# Altium PCB EV-Charger-with-sim800c_2023-07-29.pcbdoc
Units mil, origin at the board's own origin, x right, y up, seen from the top; angles counter-clockwise.
Board outline 5808.48 x 3906.63 mil, 2 copper layers (Top Layer, Bottom Layer); 82 components, 67 nets, 312 pads, 126 vias.
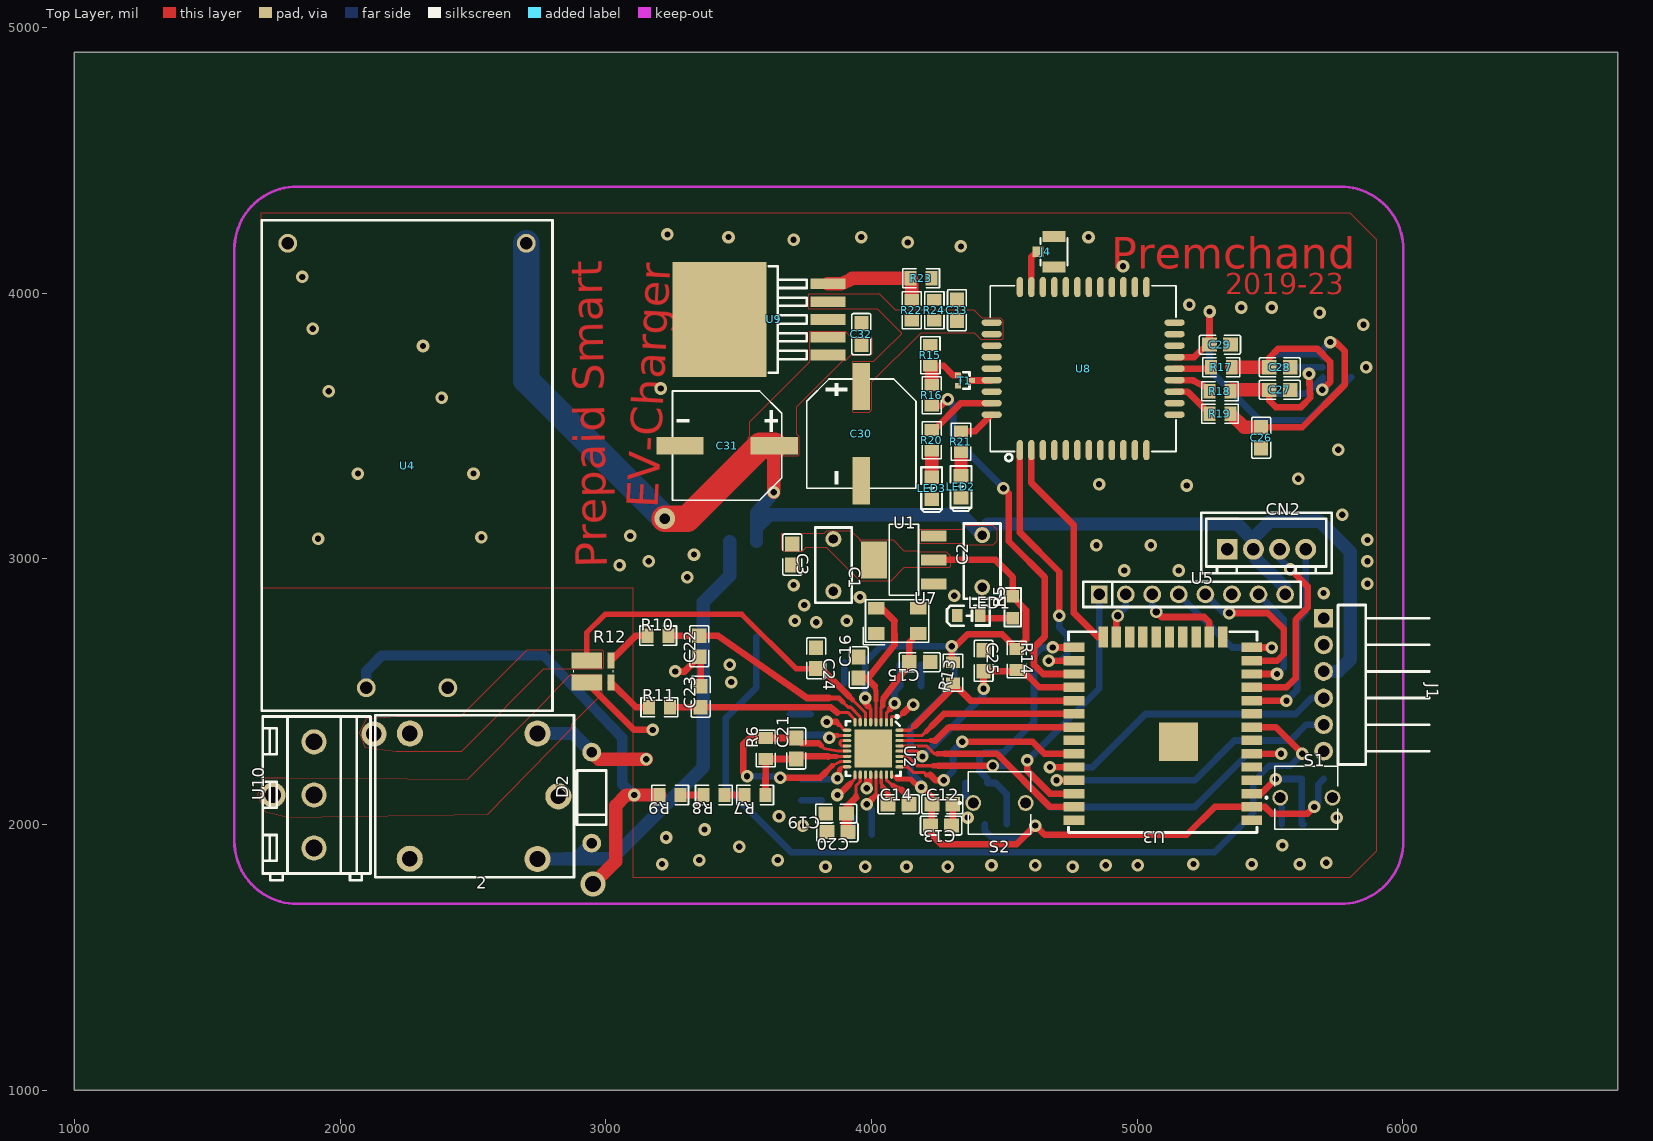
[diagram p0: Top Layer view]
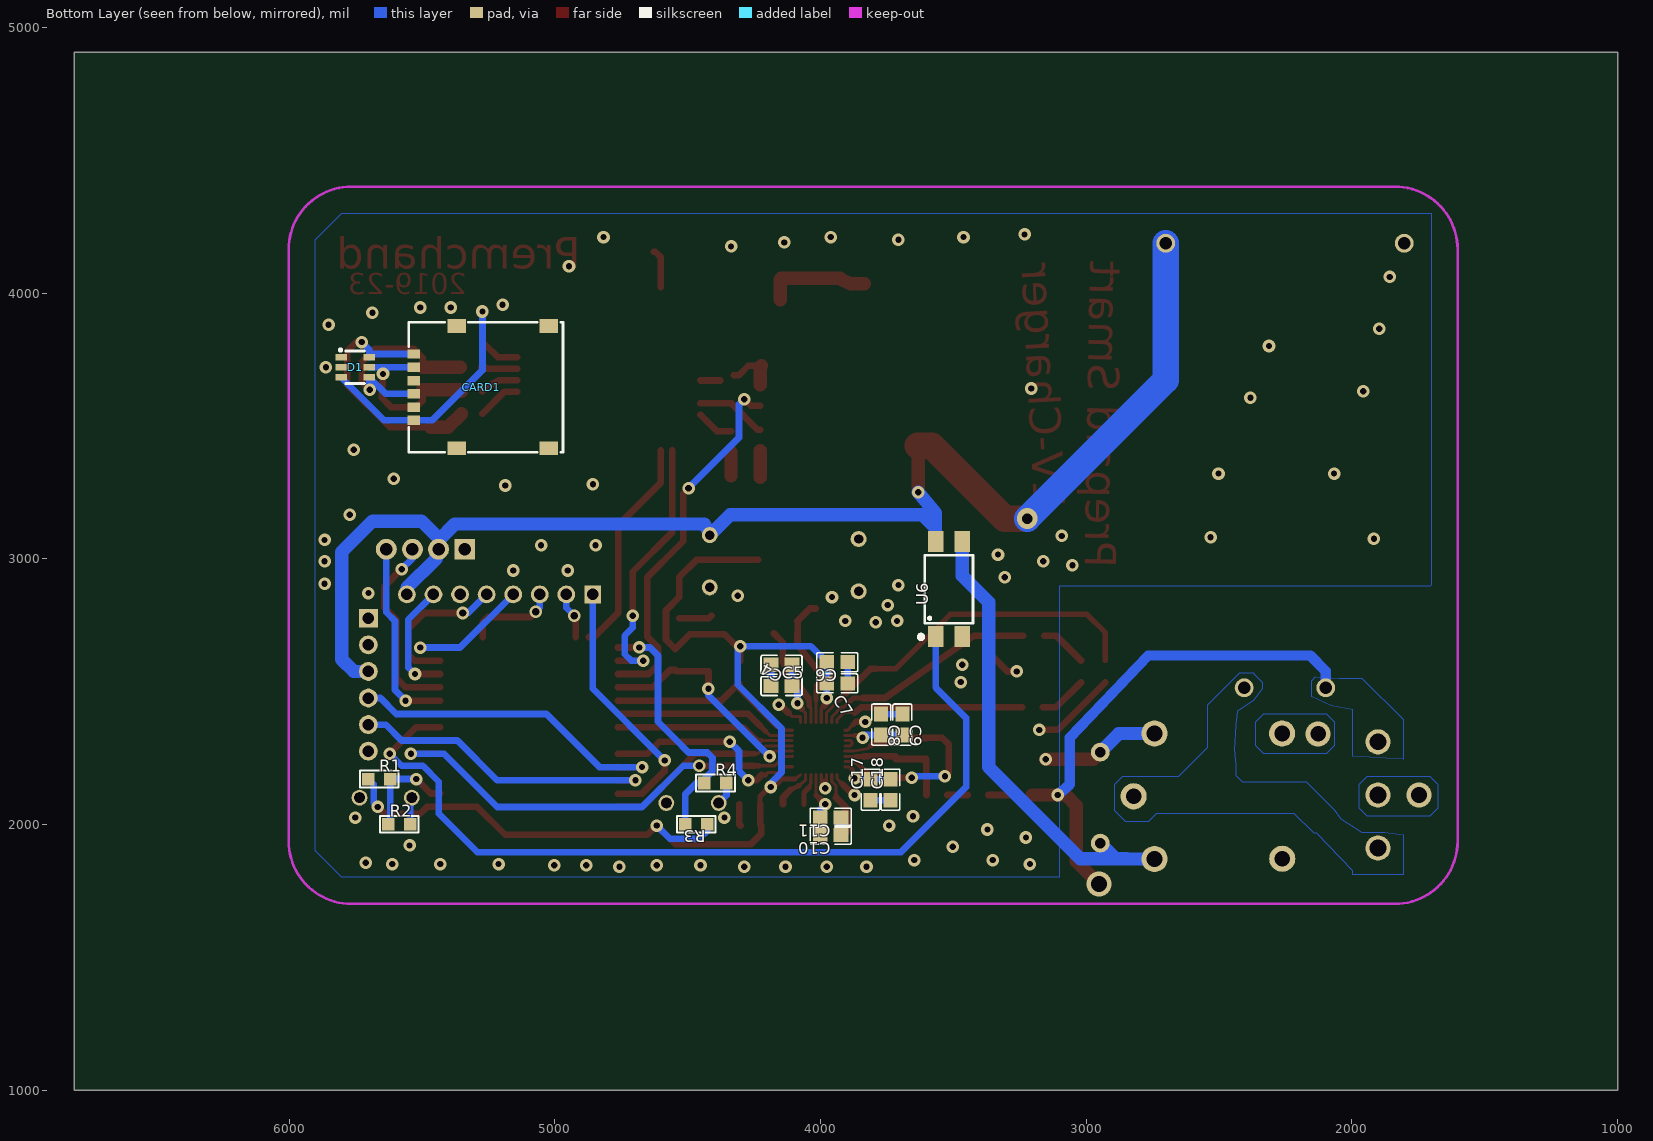
[diagram p1: Bottom Layer view, seen from below]

## Layer stack, top to bottom
Top Layer: signal copper (thickness not stored)
Dielectric: dielectric 12.6, FR-4, Dk 4.8
Bottom Layer: signal copper (thickness not stored)

## Board outline
6808.48,1000 1000,1000 1000,4906.63 6808.48,4906.63

## Components (designator, comment, footprint, x,y, rotation, side; value= is the part's Value field where it differs from the comment)
2 "RELAY-HE-JQC3FC" RELAY-HE-JQC3FC 2542,2106.63 r180 top
C1 "100nF" CAP-TH_L7.2-W3.5-P5.00-D0.5 3857,2976.63 r270 top
C2 "100nF" CAP-TH_L7.2-W3.5-P5.00-D0.5 4417,2991.63 r90 top
C3 "10uF" C0805#1 3702,3016.63 r270 top
C4 "0.1u" C0805#2 4147,2601.63 r180 bottom
C5 "4.7u" C0805#2 4147,2521.63 r0 bottom
C6 "4.7u" C0805#2 3937,2611.63 r180 bottom
C7 "0.1u" C0805#2 3937,2531.63 r180 bottom
C8 "4.7u" C0805#2 3772,2376.63 r90 bottom
C9 "0.1u" C0805#2 3692,2376.63 r90 bottom
C10 "0.1u" C0805#2 3962,1961.63 r180 bottom
C11 "4.7u" C0805#2 3962,2026.63 r180 bottom
C12 "0.1u" C0805#1 4267,2076.63 r180 top
C13 "4.7u" C0805#1 4262,1996.63 r180 top
C14 "0.47u" C0805#1 4102,2076.63 r0 top
C15 "22p" C0805#1 4182,2611.63 r180 top
C16 "22p" C0805#1 3952,2591.63 r90 top
C17 "0.1u" C0805#2 3812,2131.63 r270 bottom
C18 "4.7u" C0805#2 3737,2131.63 r270 bottom
C19 "0.1u" C0805#1 3867,2041.63 r180 top
C20 "4.7u" C0805#1 3872,1971.63 r180 top
C21 "0.15uf" C0805#1 3717,2286.63 r90 top
C22 "0.1u" C0805#1 3352,2671.63 r90 top
C23 "0.1u" C0805#1 3357,2481.63 r90 top
C24 "0.1u" C0805#1 3792,2626.63 r270 top
C25 "1u" C0805#1 4422,2616.63 r270 top
C26 "22pf" C0805#1 5467,3456.63 r90 top
C27 "22pf" C0805#1 5537,3636.63 r180 top
C28 "22pf" C0805#1 5537,3721.63 r180 top
C29 "100nf" C0805#1 5312,3806.63 r180 top
C30 "330uF" CAP-SMD_BD10.0-L10.3-W10.3-LS10.8-FD 3962,3471.63 r270 top
C31 "100uf" CAP-SMD_BD10.0-L10.3-W10.3-LS10.8-FD 3457,3426.63 r180 top
C32 "1uf" C0805#1 3962,3846.63 r270 top
C33 "100nf" C0805#1 4322,3936.63 r270 top
CARD1 "SMN-305-ARP7" NANO-SIM-SMD_SMN-305-ARP7 5277,3646.63 r270 bottom
CN2 "LCD" CONN-TH_XH-4A 5487,3036.63 r0 top
D1 "ESDA6V1-5SC6" SOT-23-6_L2.9-W1.6-P0.95-LS2.8-BR 5752,3721.63 r180 bottom
D2 "1N4007" DO-41_BD2.4-L4.7-P8.70-D0.9-RD 2947,2101.63 r90 top
J1 "TTL_And_5V-input" HDR-TH_6P-P2.54-H-M-W10.0 5702,2526.63 r270 top
J4 "UFL connector" CONUFL001-SMD 4687,4156.63 r270 top
LED1 "LED0805" LED0805-RD 4367,2786.63 r0 top
LED2 "LED-0805_R" LED0805_RED 4337,3271.63 r270 top
LED3 "LED-0805_B" LED0805_BLUE 4227,3266.63 r270 top
R1 "12K" "RESISTOR SMD 0805"#1 5702,2171.63 r0 bottom
R2 "470" "RESISTOR SMD 0805"#1 5627,2001.63 r0 bottom
R3 "12K" "RESISTOR SMD 0805"#1 4427,2001.63 r180 bottom
R4 "470" "RESISTOR SMD 0805"#1 4437,2156.63 r0 bottom
R5 "330" "RESISTOR SMD 0805"#2 4532,2776.63 r90 top
R6 "1k" R0805 3602,2286.63 r90 top
R7 "330k" R0805 3562,2111.63 r180 top
R8 "330k" R0805 3407,2111.63 r180 top
R9 "330k" R0805 3242,2111.63 r180 top
R10 "150" R0805 3197,2711.63 r0 top
R11 "150" R0805 3202,2441.63 r0 top
R12 "WSK12161L000FEA" WSK12161L000FEA 2952,2576.63 r0 top
R13 "10k" R0805 4307,2571.63 r90 top
R14 "10k" R0805 4547,2621.63 r90 top
R15 "47K" R0805 4222,3766.63 r270 top
R16 "4.7K" R0805 4227,3616.63 r270 top
R17 "51R" R0805 5317,3721.63 r180 top
R18 "51R" R0805 5312,3631.63 r180 top
R19 "51R" R0805 5312,3546.63 r180 top
R20 "470" R0805 4227.03,3446.61 r270 top
R21 "470" R0805 4337,3441.63 r270 top
R22 "100K" R0805 4152,3936.63 r270 top
R23 "43K" R0805 4187,4056.63 r180 top
R24 "470" R0805 4237,3936.63 r90 top
S1 "ENABLE" SW_BUTT-2 5637,2101.63 r0 top
S2 "BOOT" SW_BUTT-2 4482,2081.63 r0 top
T1 "BC847F" SOT490 4352,3671.63 r270 top
U1 "AMS1117-1.8_C2891837" SOT-223_L6.5-W3.5-P2.30-LS7.0-BR 4122,2996.63 r0 top
U2 "ADE9153AACPZ" LFCSP-32_L5.0-W5.0-P0.50-TL-EP3.6 4007,2286.63 r270 top
U3 "ESP32-WROOM-32U(4MB)" WIFI-SMD_ESP32-WROOM-32UE-A 5097.05,2361.64 r180 top
U4 "HLK-10M05" PWRM-TH_HLK-10M05 2252,3351.63 r90 top
U5 "RFID" HDR-TH_8P-P2.54-V-F 5207,2866.63 r0 top
U6 "Optocoupler_Relay" SMD-4_L6.5-W4.6-P2.54-LS10.3-TL 3516.97,2886.64 r270 bottom
U7 "12.288MHz" CRYSTAL-SMD_4P-L5.0-W3.2-BL 4097,2766.63 r0 top
U8 "SIM800C" GSM-SMD_42P-L17.6-W15.7-P1.10-TL 4797,3716.63 r90 top
U9 "MIC29302WU_C2995533" TO-263-5_L10.1-W8.7-P1.70-LS15.2-BR 3632,3901.63 r0 top
U10 "DB128V-5.0-3P_C484209" CONN-TH_3P-P5.00_DB128V-5.0-3P 1902,2111.63 r90 top
? "" ? 3802,2901.81 r0 top
? "" ? 3904.24,3051.63 r0 top

## Footprints (in the part's own frame and the unit in brackets; to place one, negate y for a bottom-side part, rotate by r counter-clockwise, add the part's x,y. Pads: shape width x height; smd on the part's side, far side on the other; paste and mask are expansions set on the pad)
C0805#1 [mm]
  rect 1.41x1.35 smd paste-100 mask+0.051: 1(-1,0) 2(1,0)
  silkscreen extent -1.96,-0.9 1.96,0.9
C0805#2 [mm]
  rect 1.41x1.35 smd paste-100 mask+0.051: 1(1,0) 2(-1,0)
  silkscreen extent -1.96,-0.9 1.96,0.9
CAP-SMD_BD10.0-L10.3-W10.3-LS10.8-FD [mm]
  rect 4.5x1.65 smd paste+0 mask+0.051: 1(-4.5,0) 2(4.5,0)
  silkscreen extent -5.23,-5.23 5.23,5.23
CAP-TH_L7.2-W3.5-P5.00-D0.5 [mil]
  round 60 hole 35.43 paste+0 mask+2: 1(-98.43,0) 2(98.42,0)
  silkscreen extent -142,-69 142,69
CONN-TH_3P-P5.00_DB128V-5.0-3P [mm]
  round 2.4 hole 1.6 paste+0 mask+0.051: 1(-5.08,0) 2(0,0) 3(5.08,0)
  silkscreen extent -8.14,-5.4 7.51,4.9
CONN-TH_XH-4A [mm]
  rect 2x2 hole 1.2 paste+0 mask+0.051: 1(-3.75,0)
  round 2 hole 1.2 paste+0 mask+0.051: 2(-1.25,0) 3(1.25,0) 4(3.75,0)
  silkscreen extent -6.25,-2.3 6.25,3.5
CONUFL001-SMD [mm]
  rect 1x1.05 smd paste+0 mask+0.051: 1(0,-1.525)
  rect 1.05x2.2 smd paste+0 mask+0.051: 2(-1.475,0) 3(1.475,0)
  silkscreen extent -1.3,-1.3 1.3,1.3
CRYSTAL-SMD_4P-L5.0-W3.2-BL [mm]
  rect 1.6x1.2 smd paste+0 mask+0.051: 1(-2,-1.2) 2(2,-1.2) 3(2,1.2) 4(-2,1.2)
  silkscreen extent -3.26,-2.26 3.03,2.03
DO-41_BD2.4-L4.7-P8.70-D0.9-RD [mm]
  round 1.8 hole 1 paste+0 mask+0.051: 1(-4.35,0) 2(4.35,0)
  silkscreen extent -2.6,-1.4 2.6,1.4
GSM-SMD_42P-L17.6-W15.7-P1.10-TL [mm]
  oval 1.933x0.616 smd paste+0 mask+0.051: 1(-7.792,6.05) 2(-7.792,4.95) 3(-7.792,3.85) 4(-7.792,2.75) 5(-7.792,1.65) 6(-7.792,0.55) 7(-7.792,-0.55) 8(-7.792,-1.65) 9(-7.792,-2.75) 10(-7.792,-3.85) 11(-7.792,-4.95) 12(-7.792,-6.05) 22(7.792,-6.05) 23(7.792,-4.95) 24(7.792,-3.85) 25(7.792,-2.75) 26(7.792,-1.65) 27(7.792,-0.55) 28(7.792,0.55) 29(7.792,1.65) 30(7.792,2.75) 31(7.792,3.85) 32(7.792,4.95) 33(7.792,6.05)
  oval 0.616x1.933 smd paste+0 mask+0.051: 13(-4.4,-8.742) 14(-3.3,-8.742) 15(-2.2,-8.742) 16(-1.1,-8.742) 17(0,-8.742) 18(1.1,-8.742) 19(2.2,-8.742) 20(3.3,-8.742) 21(4.4,-8.742) 34(4.4,8.742) 35(3.3,8.742) 36(2.2,8.742) 37(1.1,8.742) 38(0,8.742) 39(-1.1,8.742) 40(-2.2,8.742) 41(-3.3,8.742) 42(-4.4,8.742)
  silkscreen extent -8.84,-8.88 7.93,8.88
HDR-TH_6P-P2.54-H-M-W10.0 [mm]
  rect 1.8x1.8 hole 1.1 paste+0 mask+0.051: 1(-6.35,0)
  round 1.8 hole 1.1 paste+0 mask+0.051: 2(-3.81,0) 3(-1.27,0) 4(1.27,0) 5(3.81,0) 6(6.35,0)
  silkscreen extent -7.62,1.37 7.62,10.11
HDR-TH_8P-P2.54-V-F [mm]
  rect 1.575x1.7 hole 1.1 paste+0 mask+0.051: 1(-8.89,0)
  round 1.7 hole 1.1 paste+0 mask+0.051: 2(-6.35,0) 3(-3.81,0) 4(-1.27,0) 5(1.27,0) 6(3.81,0) 7(6.35,0) 8(8.89,0)
  silkscreen extent -10.4,-1.2 10.4,1.2
LED0805-RD [mm]
  rect 1x1.25 smd paste+0 mask+0.051: 1(-1.1,0) 2(1.1,0)
  silkscreen extent -2.1,-0.95 1.98,0.96
LED0805_BLUE [mil]
  rect 51.2x55.1 smd paste+0 mask+2: 1(-41.35,0) 2(41.35,0)
  silkscreen extent -79,-39 91,39
LED0805_RED [mil]
  rect 51.2x55.1 smd paste+0 mask+2: 1(-41.35,0) 2(41.35,0)
  silkscreen extent -79,-39 91,39
LFCSP-32_L5.0-W5.0-P0.50-TL-EP3.6 [mm]
  oval 0.8x0.3 smd paste-100 mask+0.051: 1(-2.5,1.75) 2(-2.5,1.25) 3(-2.5,0.75) 4(-2.5,0.25) 5(-2.5,-0.25) 6(-2.5,-0.75) 7(-2.5,-1.25) 8(-2.5,-1.75) 17(2.5,-1.75) 18(2.5,-1.25) 19(2.5,-0.75) 20(2.5,-0.25) 21(2.5,0.25) 22(2.5,0.75) 23(2.5,1.25) 24(2.5,1.75)
  oval 0.3x0.8 smd paste-100 mask+0.051: 9(-1.75,-2.5) 10(-1.25,-2.5) 11(-0.75,-2.5) 12(-0.25,-2.5) 13(0.25,-2.5) 14(0.75,-2.5) 15(1.25,-2.5) 16(1.75,-2.5) 25(1.75,2.5) 26(1.25,2.5) 27(0.75,2.5) 28(0.25,2.5) 29(-0.25,2.5) 30(-0.75,2.5) 31(-1.25,2.5) 32(-1.75,2.5)
  rect 3.6x3.6 smd paste-100 mask+0.051: 33(0,0)
  silkscreen extent -3.17,-2.6 2.6,2.6
NANO-SIM-SMD_SMN-305-ARP7 [mm]
  rect 0.9x1.2 smd paste+0 mask+0.051: 1(3.175,-6.45) 2(0.635,-6.45) 3(-1.905,-6.45) 5(1.905,-6.45) 6(-0.635,-6.45) 7(-3.175,-6.45)
  rect 1.3x1.8 smd paste+0 mask+0.051: 8(5.85,6.45) 9(5.85,-2.35) 10(-5.85,-2.35) 11(-5.85,6.45)
  silkscreen extent -6.21,-6.92 6.23,7.81
PWRM-TH_HLK-10M05 [mm]
  round 1.8 hole 1.2 paste+0 mask+0.051: 1(-21.25,3.9) 2(-21.25,-3.9) 3(21.25,11.4) 4(21.25,-11.4)
  silkscreen extent -23.45,-13.9 23.45,13.9
R0805 [mil]
  rect 44.59x54.21 smd paste-3937.01 mask+2: 1(-39.37,0) 2(39.37,0)
  silkscreen extent -69,-36 69,36
RELAY-HE-JQC3FC [mm]
  round 2.5 hole 1.5 paste+0 mask+0.102: 1(7.1,-6) 3(-5.1,6) 4(-7.1,0) 5(-5.1,-6)
  round 2.5 hole 1.5 paste+0 mask+0.051: 6(7.112,5.969)
  silkscreen extent -8.6,-7.75 10.4,7.75
"RESISTOR SMD 0805"#1 [mm]
  rect 1.2x1.2 smd paste+0 mask+0.051: 1(0,0)
  rect 1.2x1.2 smd paste+0 mask+0.102: 2(-2.1,0)
  silkscreen extent -2.9,-0.8 0.8,0.8
"RESISTOR SMD 0805"#2 [mm]
  rect 1.2x1.2 smd paste+0 mask+0.051: 1(0,0)
  rect 1.2x1.2 smd paste+0 mask+0.102: 2(2.1,0)
  silkscreen extent -0.8,-0.8 2.9,0.8
SMD-4_L6.5-W4.6-P2.54-LS10.3-TL [mm]
  rect 2x1.5 smd paste+0 mask+0.051: 1(4.55,-1.27) 2(4.55,1.27) 3(-4.55,1.27) 4(-4.55,-1.27)
  silkscreen extent -3.25,-2.87 4.77,2.3
SOT490 [mil]
  rect 19.7x23.6 smd paste+0 mask+2: 1(-20,-26) 2(20,-26) 3(0,26)
  silkscreen extent -31,-17 31,17
SOT-23-6_L2.9-W1.6-P0.95-LS2.8-BR [mm]
  rect 1.1x0.6 smd paste+0 mask+0.051: 1(-1.35,0.95) 2(-1.35,0) 3(-1.35,-0.95) 4(1.35,-0.95) 5(1.35,0) 6(1.35,0.95)
  silkscreen extent -1.52,-1.55 0.9,1.78
SOT-223_L6.5-W3.5-P2.30-LS7.0-BR [mm]
  rect 2.465x1.05 smd paste+0 mask+0.051: 1(2.857,-2.3) 2(2.857,0) 3(2.857,2.3)
  rect 2.465x3.54 smd paste+0 mask+0.051: 4(-2.857,0)
  silkscreen extent -1.4,-3.4 1.4,3.4
SW_BUTT-2 [mil]
  round 59.37 hole 39.36 paste+0 mask+2: 1(-98.42,0) 2(98.42,0)
  silkscreen extent -154,-118 118,118
TO-263-5_L10.1-W8.7-P1.70-LS15.2-BR [mm]
  rect 3.359x1.02 smd paste+0 mask+0.051: 1(5.183,-3.4) 2(5.183,-1.7) 3(5.183,0) 4(5.183,1.7) 5(5.183,3.4)
  rect 9x11 smd paste+0 mask+0.051: 6(-5.183,0)
  silkscreen extent -0.45,-5.1 3.15,5.1
WIFI-SMD_ESP32-WROOM-32UE-A [mm]
  rect 2x0.9 smd paste+0 mask+0.051: 1(-8.5,8.755) 2(-8.5,7.485) 3(-8.5,6.215) 4(-8.5,4.945) 5(-8.5,3.675) 6(-8.5,2.405) 7(-8.5,1.135) 8(-8.5,-0.135) 9(-8.5,-1.405) 10(-8.5,-2.675) 11(-8.5,-3.945) 12(-8.5,-5.215) 13(-8.5,-6.485) 14(-8.5,-7.755) 25(8.5,-7.755) 26(8.5,-6.485) 27(8.5,-5.215) 28(8.5,-3.945) 29(8.5,-2.675) 30(8.5,-1.405) 31(8.5,-0.135) 32(8.5,1.135) 33(8.5,2.405) 34(8.5,3.675) 35(8.5,4.945) 36(8.5,6.215) 37(8.5,7.485) 38(8.5,8.755)
  rect 0.9x2 smd paste+0 mask+0.051: 15(-5.715,-8.755) 16(-4.445,-8.755) 17(-3.175,-8.755) 18(-1.905,-8.755) 19(-0.635,-8.755) 20(0.635,-8.755) 21(1.905,-8.755) 22(3.175,-8.755) 23(4.445,-8.755) 24(5.715,-8.755)
  rect 3.7x3.7 smd paste+0 mask+0.051: 39(-1.5,1.255)
  silkscreen extent -9,-9.27 9.02,9.95
WSK12161L000FEA [mil]
  rect 116.14x58.86 smd paste+0 mask+2: 1(-23.62,-41.46) 4(-23.62,41.46)
  rect 27.56x58.86 smd paste+0 mask+2: 2(67.91,-41.46) 3(67.91,41.46)
  silkscreen extent -75,-4 75,4
? [mil]

## Via types
v1: diameter 47.24, hole 23.62, Top Layer to Bottom Layer, tented both sides, 117 vias
v2: diameter 47.24, hole 27.56, Top Layer to Bottom Layer, tented both sides, 4 vias
v3: diameter 94.49, hole 59.06, Top Layer to Bottom Layer, tented both sides, 3 vias
v4: diameter 47.24, hole 24.8, Top Layer to Bottom Layer, tented both sides, 1 vias
v5: diameter 78.74, hole 39.37, Top Layer to Bottom Layer, tented both sides, 1 vias

## Nets (pads, with @x,y where several pads share a name; then routed paths per layer and width w, separated by ;. In a path a pad name is that pad's centre, name@x,y a point inside that pad or via, vN(x,y) a via of type N, cw(c..) or ccw(c..) an arc to the next point about the centre after c; other vN are vias at no path point)
2_DVDDOUT: C4.1 C5.2 U2.2 | length 264.1
  Top Layer w12: U2.2@4056.21,2385.05 4057,2385.84 4057,2411.63 4057,2421.63 4087,2451.63 v1(4087,2456.63)
  Top Layer w25: 4072,2436.63 4087,2451.63 v1(4087,2456.63)
  Bottom Layer w25: v1(4087,2456.63) 4087,2501 C5.2 C4.1
3_CLKOUT: C15.2 U2.3 U7.2 | length 390.2
  Top Layer w12.01: U2.3@4036.5,2385.03 4036.5,2441.13 4042,2446.63
  Top Layer w20: 4042,2446.63 4042,2466.63 4047,2471.63 4047,2476.63 4052,2481.63
  Top Layer w25: 4047,2476.63 4122,2576.63 C15.2 4142.6,2686.33 U7.2
3V3: C1.1 C3.1 C6.2 C7.2 C12.2 C13.2 R1.1 R3.1 R5.2 R13.2 R14.2 U1.2 U1.4 U2.5 U2.24 U3.2 | length 4447.4
  Top Layer w12.01: 3988.4,2445.23 3997.15,2436.48 U2.5@3997.15,2385.05 ; U2.24 4097,2171.63
  Top Layer w20: 4097,2171.63 4137,2171.63 4147,2171.63 4177,2141.63 v1(4187,2141.63) 4192,2141.63 4227.63,2106 C12.2
  Top Layer w25: v1(3977,2476.63) 3977,2456.63 3988.4,2445.23 ; C13.2 4222.6,1966.03 4262,1926.63 4547,1926.63 v1(4617,1996.63) 4652,1961.63 5187,1961.63 5292.3,2066.93 5431.7,2066.93 5481.67,2066.96 5507,2041.63 5642,2041.63 v1(5667,2066.63) ; C13.2 4227.63,2001.63 C12.2 ; U1.2 4467,2996.63 4532,2931.63 R5.2 4532,2856.63 4582,2806.63 4582,2696 R14.2 4491.37,2716.63 4362,2716.63 4317,2671.63 v1(4302,2671.63) 4302,2616.03 R13.2
  Bottom Layer w25: v1(3977,2476.63) 3977,2531 C7.2 C6.2 4036.37,2671.63 v1(4302,2671.63) 4312,2661.63 4312,2526.63 4147,2361.63 4147,2196.63 4187,2156.63 v1(4187,2141.63) ; R3.1 4427,1976.63 4457,1946.63 4567,1946.63 v1(4617,1996.63) ; v1(5667,2066.63) 5682,2081.63 5682,2151.63 R1.1
4_CLKIN: C16.1 U2.4 U7.4 | length 617.6
  Top Layer w12.01: U2.4@4017,2384.89 4017,2501.62
  Top Layer w20: 4012,2521.63 4016.84,2501.79 4017,2468.13
  Top Layer w25: 4012,2521.63 3981.4,2552.23 3952,2552.23 3987.6,2552.23 4087,2676.63 4085.6,2767.63 ; U7.4@4018.3,2813.83 4039.8,2813.83 4087,2766.63
6_IAMS: 2.1 C24.2 R12.4 U2.6 | length 1561.3
  Top Layer w12: C24.2@3792,2587.23 3811.4,2587.23 3977.5,2421.13 U2.6@3977.5,2385.03
  Top Layer w20: R12.4 2928.38,2723.01 2997,2791.63 3512,2791.63 3716.4,2587.23 C24.2@3792,2587.23 ; 3912.24,2486.39 3928.5,2470.13
  Top Layer w25: C24.2 3811.37,2587.26 3847.74,2550.89 ; 3846.99,2551.64 3914.49,2484.14
  other v3: 2127,2341.63
7_IAN: C22.2 R10.2 U2.7 | length 842
  Top Layer w12.01: 3892,2461.63 3912,2441.63 3922,2441.63 3957,2406.63 U2.7@3957.8,2385.03
  Top Layer w20: 3843.16,2476.63 3865.39,2476.63 3877,2476.63 3892,2461.63
  Top Layer w25: R10.2 C22.2 3422.6,2711.03 3757,2476.63 3812,2476.63 3840,2476.63
8_IAP: C23.1 R11.2 U2.8 | length 725.4
  Top Layer w12.01: 3871,2421.63 3912,2421.63 3938.1,2395.53 U2.8@3938.1,2385.03
  Top Layer w25: R11.2 3357,2442.23 3846,2442.23 3871,2421.63
10_VDDOUT2P5: C8.2 C9.2 U2.10 | length 224.8
  Top Layer w12: 3872,2335.83 U2.10
  Top Layer w20: v1(3842,2326.63) 3851.2,2335.82 3872,2335.82
  Bottom Layer w25: C9.2 C8.2 3831.37,2337.26 v1(3842,2326.63)
14_VAP: C21.1 R6.1 R7.1 U2.14 | length 447.1
  Top Layer w12.01: 3872,2256.63 U2.14
  Top Layer w20: 3837,2256.63 3867,2256.63
  Top Layer w25: R7.1 3602,2247.23 3692,2247.23 3717,2247.23 3717,2257.13 3837,2256.63
15_VAN: C21.2 R6.2 U2.13 U2.15 | length 955
  Top Layer w12.01: 3812,2296.63 3822,2286.63 3871.8,2276.83 U2.13 ; 3852,2221.63 3882,2236.63 U2.15 ; U2.13@3899.9,2276.79 U2.13
  Top Layer w20: 3802,2306.63 3812,2296.63 ; 3827,2196.63 3852,2221.63
  Top Layer w25: v1(3532,2181.63) 3517,2196.63 3517,2231.63 3517,2301.63 3542,2326.63 R6.2 ; R6.2 3692,2326.03 C21.2 3736.4,2306.63 3802,2306.63 ; v1(3657,2176.63) 3807,2176.63 3827,2196.63
  Bottom Layer w25: v1(3532,2181.63) 3652,2181.63 v1(3657,2176.63)
16_AVDDOUT: C17.2 C18.2 U2.16 | length 225.1
  Top Layer w12.01: 3882,2206.63 3887,2216.63 U2.16
  Top Layer w20: v1(3872,2174.13) 3882,2209.13
  Top Layer w25: v1@3872,2171.63 v1@3877,2191.63
  Bottom Layer w25: C18.2 C17.2 3871.37,2171 v1@3872,2171.63
18_REFIN: C19.1 C20.1 U2.18 | length 240
  Top Layer w12.01: 3942,2111.63 3942,2146.63 3957.8,2162.43 U2.18
  Top Layer w20: 3942,2101.63 3942,2111.63
  Top Layer w25: C19.1 3906.37,2066 3942,2101.63
  Top Layer w39.37: C19.1 3906.37,1976.63 C20.1
21_MSH: C10.2 C11.2 U2.21 | length 249
  Top Layer w12.01: 4016.84,2111.63 U2.21
  Top Layer w20: 4002,2096.63 4016.8,2111.63
  Top Layer w25: v1(3982,2076.63) 4002,2096.63
  Bottom Layer w25: v1(3982,2076.63) 4001.37,2057.26 C11.2 C10.2
BOOT: R3.2 R4.1 U3.25 | length 983.8
  Top Layer w25: v1(4682,2666.94) U3.25@4762.35,2666.94
  Bottom Layer w25: R3.2 4509.68,2113.95 4467,2156.63 R4.1 4437,2171.63 4407,2201.63 4407,2251.63 4427,2271.63 4497,2271.63 4547,2322.13 4612,2387.13 4612,2636.63 4642.31,2666.94 v1(4682,2666.94)
C26_2: C26.2 CARD1.7 D1.6 R19.1 | length 954.8
  Top Layer w25: C26.2 5621.37,3496 5782,3656.63 5782,3781.63 5747,3816.63 v1(5727,3816.63)
  Top Layer w50: R19.1 5402.6,3496.03 C26.2
  Bottom Layer w25: CARD1.7 5686.25,3771.63 5698.85,3759.03 5698.85,3788.48 v1(5727,3816.63)
C27_2: C27.2 CARD1.3 D1.5 R18.1 | length 656
  Top Layer w25: C27.2 5497.6,3596.03 5522,3571.63 5617,3571.63 5652,3606.63 v1(5647,3696.63)
  Top Layer w50: R18.1 5356.37,3636.63 C27.2
  Bottom Layer w25: CARD1.3 5634.9,3721.63 ; v1(5647,3696.63) 5634.9,3708.72 5634.9,3721.63 ; D1.5@5698.85,3721.63 5634.9,3721.63
C28_2: C28.2 CARD1.2 D1.4 R17.1 | length 800.8
  Top Layer w25: C28.2 5497.63,3757.26 5532,3791.63 5677,3791.63 5727,3741.63 5727,3666.63 v1(5697,3636.63)
  Top Layer w50: R17.1 5447.04,3721.63 C28.2
  Bottom Layer w25: CARD1.2 5636.25,3621.63 5698.85,3684.23 5698.85,3638.48 v1(5697,3636.63)
EN: R1.2 R2.1 U3.3 | length 402.1
  Top Layer w25: U3.3 5467.33,2116.96 v1(5522,2171.63)
  Bottom Layer w25: v1@5512,2161.63 v1(5522,2171.63) R1.2 5619.32,2001.63 R2.1
GND: 2.5 C1.2 C2.1 C3.2 C4.2 C5.1 C6.1 C7.1 C8.1 C9.1 C10.1 C11.1 C12.1 C13.1 C15.1 C16.2 C17.1 C18.1 C19.2 C20.2 C22.1 C23.2 C24.1 C25.1 C26.1 C27.1 C28.1 C29.1 C30.2 C31.2 C32.1 C33.1 CARD1.5 CARD1.9 CARD1.10 CARD1.11 CN2.1 D1.2 D2.2 J1.1 J4.2 J4.3 LED1.1 LED2.2 LED3.2 R12.1 R15.1 R23.1 R24.2 S1.2 S2.2 T1.2 U1.1 U2.1 U2.9 U2.17 U2.19 U2.20 U3.1 U3.15 U3.38 U4.3 U5.6 U6.2 U7.1 U7.3 U8.8 U8.13 U8.19 U8.21 U8.27 U8.30 U8.31 U8.33 U8.36 U8.37 U9.3 U9.6 U10.2 | length 1917
  Top Layer w12: 3882,2371.63 3898.11,2355.52 U2.9
  Top Layer w12.01: 3922,2156.63 3938.1,2172.73 U2.17 ; U2.19 3977.47,2141.16 v1(3982,2136.63) 3997.15,2151.78 U2.20 ; U2.1@4075.89,2385.05 4075.89,2405.52 4077,2406.63 4107,2406.63 4132,2431.63
  Top Layer w20: 3867,2386.63 3877,2376.63 ; 3917,2151.63 3922,2156.63
  Top Layer w25: R12.1 3106.92,2356.63 v1(3177,2356.63) ; v1(3262,2576.63) 3296.37,2576.63 C22.1 3357,2627.26 C23.2 ; v1(3832,2386.63) 3867,2386.63 ; v1(3872,2111.63) 3877,2111.63 3912,2146.63 ; v1(3982,2136.63) 3982,2156.63 3987,2161.63 ; 4120.9,2420.53 4132,2431.63 4152,2451.63 v1(4157,2451.63) ; C13.1 4306.37,2001.63 C12.1
  Top Layer w50: D2.2 2973.26,2246.63 v1(3152,2246.63)
  Bottom Layer w25: C9.1 C8.1 ; C18.1 C17.1 ; C7.1 C6.1 ; C5.1 C4.2
  Bottom Layer w39.37: C10.1 C11.1
  Bottom Layer w50: 2.5 2877.06,2342.83 D2.2
  other v1: 3827,1841.63 3977,1841.63 4132,1841.63 4287,1841.63 4757,1841.63 4452,1846.63 4617,1846.63 4882,1846.63 5002,1846.63 3212,1851.63 5212,1851.63 5432,1851.63 5612,1851.63 5712,1856.63 3352,1866.63 3647,1866.63 3502,1916.63 5547,1921.63 3227,1951.63 3372,1981.63 3742,1996.63 4362,2026.63 5752,2026.63 3652,2031.63 3472,2536.63 3467,2601.63 3792,2761.63 3712,2766.63 3907,2766.63 3747,2826.63 3957,2856.63 4312,2861.63 5702,2871.63 3707,2901.63 5867,2906.63 3307,2931.63 4952,2956.63 5157,2956.63 3052,2976.63 3162,2991.63 5867,2991.63 3332,3016.63 4847,3051.63 5052,3051.63 5867,3071.63 1917,3076.63 2532,3081.63 3092,3086.63 5772,3166.63 5187,3276.63 4857,3281.63 5607,3301.63 2067,3321.63 2502,3321.63 5757,3411.63 2382,3606.63 1957,3631.63 3207,3641.63 5862,3721.63 2312,3801.63 1897,3866.63 5852,3881.63 5687,3926.63 5392,3946.63 5507,3946.63 5197,3956.63 1857,4061.63 4947,4101.63 4337,4176.63 4137,4191.63 3707,4201.63 3462,4211.63 3962,4211.63 4817,4211.63 3232,4221.63
  other v3: 1747,2111.63
GSM_RX: U3.24 U8.2 | length 826.9
  Top Layer w25: U8.2@4602.1,3409.83 4602.1,3286.53 4762,3126.63 4762,2906.63 4762,2796.62 4852.3,2706.33 U3.24
GSM_TX: U3.26 U8.1 | length 1017.9
  Top Layer w25: U8.1@4558.8,3409.83 4558.8,3099.83 4707,2951.63 v1(4707,2786.63) ; v1(4667,2616.63) 4762.07,2616.63 U3.26
  Bottom Layer w25: v1(4667,2616.63) 4712,2616.63 4737,2641.63 4737,2711.63 4707,2741.63 v1(4707,2786.63)
LCD_SCL: CN2.4 U3.10 | length 737.6
  Top Layer w25: U3.10@5431.65,2466.94 5431.96,2466.63 v1(5562,2466.63)
  Bottom Layer w25: v1@5567,2471.63 v1(5562,2466.63) 5602,2506.63 5602,2766.63 5634.64,2799.26 CN2.4
LCD_SDA: CN2.3 U3.11 | length 727.2
  Top Layer w25: U3.11@5431.65,2516.94 5492,2516.94 5562.3,2516.93 5597,2551.63 5597,2771.63 5642,2816.63 5642,2896.63 v1(5577,2961.63)
  Bottom Layer w25: CN2.3 5536.21,3002.42 v1(5577,2961.63)
LED1_2: LED1.2 R5.1 | length 125.8
  Top Layer w25: LED1.2 4420.31,2776.63 R5.1
MCU5_CS: R13.1 U2.32 U3.29 | length 766.4
  Top Layer w12.01: U2.32 4145.89,2355.52 4162,2371.63
  Top Layer w25: 4162,2371.63 4307,2516.63 R13.1 4372.3,2466.93 U3.29@4762.4,2466.93
MCU17_RST: C25.2 R14.1 U2.28 U3.28 | length 880.3
  Top Layer w12.01: U2.28 4171.84,2276.79 v1(4192,2256.63)
  Top Layer w25: v1(4422,2511.63) C25.2 4542,2577.26 R14.1 4566.37,2582.26 4631.69,2516.94 U3.28@4762.35,2516.94
  Bottom Layer w25: v1(4192,2256.63) 4422,2486.63 v1(4422,2511.63)
MCU18_SCK: U2.31 U3.30 | length 690.6
  Top Layer w12.01: U2.31 4191.2,2335.83 4207,2351.63
  Top Layer w20: 4207,2351.63 4227,2371.63
  Top Layer w25: 4227,2371.63 4272.3,2416.93 U3.30@4762.4,2416.93
MCU19_MISO: U2.30 U3.31 | length 668
  Top Layer w12.01: U2.30@4107,2316.63 4213.58,2316.63
  Top Layer w20: 4222,2316.63 4237,2316.16
  Top Layer w25: 4237,2316.13 4241.5,2316.13 4292.3,2366.93 U3.31@4762.4,2366.93
MCU21_CF2: U2.25 U3.33 | length 800.6
  Top Layer w12.01: U2.25 4135.9,2217.73 4157,2196.63 4197,2196.63 4207,2186.63
  Top Layer w20: 4207,2186.63 4222,2186.63
  Top Layer w25: 4222,2186.63 4242,2166.63 v1(4272,2166.63) ; v1(4342,2311.63) 4607,2311.63 4651.69,2266.94 U3.33@4762.35,2266.94
  Bottom Layer w25: v1(4272,2166.63) 4307,2201.63 4307,2276.63 v1(4342,2311.63)
MCU23_MOSI: U2.29 U3.37 | length 752
  Top Layer w12.01: U2.29 4187,2296.47 4207.2,2296.43 4237,2266.63 4247,2266.63
  Top Layer w20: 4247,2266.63 4277,2266.63
  Top Layer w25: 4277,2266.63 4472,2266.63 4671.7,2066.93 U3.37@4762.4,2066.93
MCU34_IRQ: U2.27 U3.6 | length 1708.6
  Top Layer w12.01: U2.27 4137,2256.63 4172,2221.63 4232,2221.63
  Top Layer w20: 4232,2221.63 4252,2221.63
  Top Layer w25: 4252,2221.63 v2(4457,2221.63) ; U3.6@5431.65,2266.94 5431.96,2266.63 v1(5542,2266.63)
  Bottom Layer w25: v2(4457,2221.63) 4517,2221.63 4672,2066.63 5217,2066.63 5417,2266.63 v1(5542,2266.63)
NEUTRAL: R9.2 U4.1 U10.3 | length 1931.4
  Top Layer w50: v3(2952,1776.63) 3037,1861.63 3037,1972.83 3037,2071.63 3077,2111.63 v1(3107,2111.63) R9.2
  Bottom Layer w39.37: U4.1@2098.44,2515.02 2098.44,2578.07 2157,2636.63 2767,2636.63 3062,2326.63 3062,2151.63 v1(3107,2111.63)
PHASE: 2.4 U4.2 U10.1
R2_2: R2.2 S1.1 | length 96.8
  Bottom Layer w25: R2.2 5544.32,2092.36 S1.1@5548.58,2096.63
R4_2: R4.2 S2.1 | length 87.1
  Bottom Layer w25: R4.2 4354.32,2110.89 S2.1
R7_2: R7.2 R8.1 | length 76.2
  Top Layer w25: R8.1 R7.2
R8_2: R8.2 R9.1 | length 258.7
  Top Layer w25: R9.1 R8.2 ; R9.1 R8.2 R9.1
R10_1: R10.1 R12.3 | length 176.5
  Top Layer w25: R12.3 3113.45,2711.63 R10.1
R11_1: R11.1 R12.2 | length 181.5
  Top Layer w25: R12.2 3113.45,2441.63 R11.1
R15_2: R15.2 R16.1 T1.1 | length 192.1
  Top Layer w25: R15.2 4272,3727.26 4307.63,3691.63 T1.1
  Top Layer w50: R15.2 4227,3722.26 R16.1
R20_2: LED3.1 R20.2 | length 198.4
  Top Layer w25: LED3.1 R20.2
  Top Layer w50: LED3.1 R20.2
R21_2: LED2.1 R21.2 | length 89.3
  Top Layer w50: LED2.1 R21.2
RELAY: U3.8 U6.1 | length 3340.4
  Top Layer w25: U3.8 5521.67,2366.96 v1(5622,2266.63)
  Bottom Layer w25: U6.1 3567,2516.63 3452,2401.63 3452,2141.63 3697,1896.63 5292,1896.63 5437,2041.63 5437,2161.63 5497,2221.63 5577,2221.63 v1(5622,2266.63)
RFID_CS: U3.23 U5.2 | length 177.7
  Top Layer w25: U3.23 4922,2786.63 v2(4927,2786.63)
  Bottom Layer w25: v2(4927,2786.63) 4957,2816.63 U5.2
RFID_IRQ: U3.36 U5.1 | length 987.3
  Top Layer w25: v1(4587,2241.63) 4587,2201.63 4671.7,2116.93 U3.36@4762.4,2116.93
  Bottom Layer w25: v1(4587,2241.63) 4857,2511.63 U5.1
RFID_MISO: U3.14 U5.4 | length 508.4
  Top Layer w25: U3.14@5431.6,2666.93 5431.9,2666.63 v1(5507,2666.63)
  Bottom Layer w25: U5.4 5357,2666.63 v1(5507,2666.63)
RFID_MOSI: U3.16 U5.3 | length 343.1
  Top Layer w25: v2(5072,2801.63) 5092,2781.63 5222,2781.63 5252,2781.63 5272,2761.63 U3.16
  Bottom Layer w25: U5.3 5057,2816.63 v2(5072,2801.63)
RFID_RST: U3.12 U5.7 | length 452.3
  Top Layer w25: U3.12@5431.65,2566.94 v1(5526.69,2566.94) 5527,2566.63 v1@5522,2571.63
  Bottom Layer w25: U5.7 5552,2771.63 5552,2591.63 v1@5527,2566.63
RFID_SCK: U3.13 U5.5 | length 574.4
  Top Layer w25: v2(5347,2796.63) 5492,2796.63 5552,2736.63 5552,2641.63 5527.3,2616.93 5497,2616.93 U3.13@5431.65,2616.94
  Bottom Layer w25: U5.5 5327,2796.63 v2(5347,2796.63)
RX: J1.5 U3.35 | length 1157.5
  Top Layer w25: v1(4697,2166.63) 4762.04,2166.63 U3.35@4762.35,2166.94
  Bottom Layer w25: v1(4697,2166.63) 5217,2166.63 5367,2316.63 5577,2316.63 5637,2376.63 J1.5
SIM_ANT: J4.1 U8.32 | length 146.4
  Top Layer w25: U8.32 4602.12,4136.63 4622.12,4156.63 J4.1
SIM_CLK: R18.2 U8.16 | length 146.4
  Top Layer w25: U8.16 5212,3671.63 5272.63,3637.68 R18.2
SIM_DATA: R19.2 U8.15 | length 165.9
  Top Layer w25: U8.15 5189.2,3630.03 R19.2
SIM_NETLIGHT: R20.1 U8.41 | length 267.5
  Top Layer w25: R20.1 4236.36,3485.99 4337.08,3586.71 U8.41
SIM_PWRKEY: R16.2 U3.27 | length 1402.6
  Top Layer w25: R16.2 4262.63,3577.26 v1(4287,3601.63) ; v4(4497,3266.63) 4517,3246.63 4517,3186.63 4517,3066.63 4532,3051.63 4652,2931.63 4652,2856.63 4652,2706.63 4612,2666.63 4612,2651.63 4612,2601.63 4646.67,2566.96 4652,2566.96 U3.27
  Bottom Layer w25: v1(4287,3601.63) 4307,3581.63 4307,3456.63 v4(4497,3266.63)
SIM_RST: R17.2 U8.17 | length 138.6
  Top Layer w25: U8.17 5257,3716.63 5262,3721.63 R17.2
SIM_STATUS: R21.1 U8.42 | length 141.7
  Top Layer w25: R21.1 4390.46,3481.01 U8.42
SIM_VDD: C29.2 CARD1.1 D1.3 U8.18 | length 1174.8
  Top Layer w25: U8.18 5192,3759.94 5215.3,3759.93 5262,3806.63 C29.2 v1(5272.63,3931.63)
  Bottom Layer w25: v1(5272.63,3931.63) 5272.63,3711 5462,3521.63 CARD1.1 5642.55,3521.63 D1.3@5805.15,3684.23
T1_3: T1.3 U8.39 | length 151.1
  Top Layer w25: T1.3 4451.16,3671.63 U8.39 4379.69,3673.32 T1.3
TX: J1.4 U3.34 | length 1228.2
  Top Layer w25: v1(4672,2216.63) 4762.04,2216.63 U3.34@4762.35,2216.94
  Bottom Layer w25: v1(4672,2216.63) 4832,2216.63 5032,2416.63 5597,2416.63 5657,2476.63 J1.4
U2_12: U2.11 U2.12 | length 67.2
  Top Layer w12.01: U2.12 3887.16,2296.47 3882,2301.63 3882,2311.63 3886.53,2316.16 U2.11
U2_22: C14.1 U2.22 | length 120.9
  Top Layer w12.01: U2.22 4037,2156.63 4042,2141.63
  Top Layer w20: 4042,2141.63 4062.63,2121 C14.1
U2_23: C14.2 U2.23 | length 154.3
  Top Layer w12.01: U2.23 4057,2166.63 4082,2146.63
  Top Layer w20: 4082,2146.63 4112,2131.63
  Top Layer w25: 4112,2131.63 4141.4,2102.23 C14.2
U6_3: 2.3 D2.1 U6.3 | length 1886.7
  Bottom Layer w50: D2.1 2887.06,1870.42 2.3 2847,1871.63 3022,1871.63 3367,2216.63 3367,2836.63 3467,2936.63 U6.3@3467,3065.73
U9_5: R22.1 R23.2 U9.5 | length 408.6
  Top Layer w50: U9.5 3885.86,4035.49 3932,4056.63 3927,4056.63 R23.2 4152,4052.26 R22.1
VBAT: C30.1 C33.2 R22.2 R24.1 U8.34 U8.35 U9.4
VCC: C2.2 C31.1 C32.2 CN2.2 J1.3 U1.3 U4.4 U5.8 U6.4 U9.1 U9.2 | length 5450.7
  Top Layer w50: v1(3632,3251.63) 3632,3424.47 C31.1
  Top Layer w100: v5(3222,3151.63) 3307,3151.63 3582,3426.63 C31.1
  Bottom Layer w50: U6.4 3567,3171.63 v1(3632,3251.63) ; U6.4 3567,3116.63 3617,3166.63 4340.43,3166.63 4417,3090.06 4437,3131.63 4920.99,3131.63 5377,3131.63 5437.8,3070.83 CN2.2 ; U5.8 5557,2891.63 5447,3001.63 5447,3036.63 CN2.2 ; J1.3 5757,2576.63 5802,2621.63 5802,3026.63 5687,3141.63 5502,3141.63 5437.8,3077.43 CN2.2
  Bottom Layer w100: U4.4 2700.81,3672.82 v5(3222,3151.63)
pads on no net: 2.6 CARD1.6 CARD1.8 D1.1 J1.2 J1.6 U2.26 U2.33 U3.4 U3.5 U3.7 U3.9 U3.17 U3.18 U3.19 U3.20 U3.21 U3.22 U3.32 U3.39 U8.3 U8.4 U8.5 U8.6 U8.7 U8.9 U8.10 U8.11 U8.12 U8.14 U8.20 U8.22 U8.23 U8.24 U8.25 U8.26 U8.28 U8.29 U8.38 U8.40

## Polygon pours and split planes (outlines as drawn)
PHASE on Bottom Layer (solid): 1807,1961.63 1807,1836.63 1807,1811.63 1832,1811.63 1997,1811.63 1997,1816.63 1997,1821.63 1997,1826.63 2132,1966.63 2142,1966.63 2217,2041.63 2737,2041.63 2767,2011.63 2852,2011.63 2892,2051.63 2892,2151.63 2862,2181.63 2652,2181.63 2542,2291.63 2542,2451.63 2422,2571.63 2372,2571.63 2367,2566.63 2337,2536.63 2337,2511.63 2372,2466.63 2432,2426.63 2437,2376.63 2442,2281.63 2437,2226.63 2437,2186.63 2412,2161.63 2172,2161.63 2067,2056.63 2042,2021.63 1962,1971.63 1877,1971.63
NEUTRAL on Bottom Layer (solid): 2047,2551.63 1962,2551.63 1807,2396.63 1807,2246.63 1997,2256.63 1997,2331.63 1997,2366.63 1997,2431.63 2077,2446.63 2152,2481.63 2152,2541.63 2137,2556.63
GND on Bottom Layer (solid): 3102,1801.63 5802,1801.63 5902,1901.63 5902,4201.63 5802,4301.63 4302,4301.63 2787,4301.63 2112,4301.63 1702,4301.63 1702,2901.63 1707,2896.63 3102,2896.63 3102,2836.63 3102,1821.63 3102,1806.63
GND on Bottom Layer (solid): 1902,2031.63 1942,2031.63 1972,2061.63 1972,2151.63 1942,2181.63 1707,2181.63 1677,2151.63 1677,2066.63 1677,2061.63 1707,2031.63
6_IAMS on Bottom Layer (solid): 2292,2266.63 2332,2266.63 2362,2296.63 2362,2386.63 2332,2416.63 2097,2416.63 2067,2386.63 2067,2301.63 2067,2296.63 2097,2266.63
3V3 on Top Layer (solid): 3957,3071.63 4067,3071.63 4082,3071.63 4122,3031.63 4172,3031.63 4177,3026.63 4282,3026.63 4297,3011.63 4297,2971.63 4292,2966.63 4187,2966.63 4122,2966.63 4072,2916.63 3957,2916.63 3832,3041.63 3752,3041.63 3737,3026.63 3672,3026.63 3662,3036.63 3662,3096.63 3747,3096.63 3822,3096.63 3832,3106.63 3922,3106.63 3957,3071.63 3957,3066.63
VCC on Top Layer (solid): 4182,3111.63 4287,3111.63 4342,3111.63 4352,3121.63 4357,3126.63 4457,3126.63 4472,3111.63 4472,3071.63 4472,3066.63 4462,3056.63 4457,3051.63 4357,3051.63 4347,3051.63 4342,3056.63 4182,3056.63
VBAT on Top Layer (solid): 3927,3741.63 3927,3556.63 3932,3551.63 3992,3551.63 4002,3561.63 4002,3666.63 4187,3851.63 4387,3851.63 4412,3826.63 4492,3826.63 4497,3831.63 4497,3896.63 4487,3906.63 4417,3906.63 4412,3911.63 4387,3936.63 4092,3936.63 4032,3996.63 3762,3996.63 3762,3941.63 4022,3941.63 4037,3926.63 4112,3851.63 4112,3846.63 4037,3771.63 4007,3741.63 3932,3741.63
6_IAMS on Top Layer (solid): 2212,2406.63 2097,2396.63 2072,2346.63 2092,2291.63 2212,2276.63 2457,2276.63 2587,2406.63 2667,2486.63 2767,2586.63 2987,2586.63 2992,2591.63 2992,2651.63 2987,2656.63 2842,2656.63 2702,2656.63 2452,2406.63
GND on Top Layer (solid): 2554.5,2036.63 1806.86,2026.66 1719.5,2046.63 1689.5,2111.63 1719.5,2176.63 1804.5,2176.63 2479.5,2171.63 2764.5,2456.63 2859.5,2556.63 2869.5,2566.63 2979.5,2566.63 2984.5,2561.63 2984.5,2491.63 2869.5,2376.63 2869.5,2361.63 2554.5,2036.63
VCC on Top Layer (solid): 3767,3856.63 3902,3856.63 3922,3836.63 3997,3836.63 4002,3831.63 4002,3771.63 3997,3766.63 3922,3766.63 3902,3746.63 3892,3746.63 3717,3571.63 3717,3471.63 3727,3461.63 3727,3391.63 3722,3386.63 3547,3386.63 3537,3396.63 3537,3456.63 3542,3461.63 3542,3516.63 3767,3741.63
GND on Top Layer (solid): 3102,1801.63 5802,1801.63 5902,1901.63 5902,4201.63 5802,4301.63 5067,4301.63 4307,4301.63 2792,4301.63 2522,4301.63 2237,4301.63 1702,4301.63 1702,2896.63 1707,2891.63 3102,2891.63 3102,2831.63 3102,1816.63 3102,1801.63

## Keep-outs
Keep-Out Layer:
  lines w10: 1602,1937.85 ccw(c1838.22,1937.85) 1838.22,1701.63 ; 1602,4165.41 cw(c1838.22,4165.41) 1838.22,4401.63 ; 5765.77,1701.63 ccw(c5765.77,1937.85) 6001.99,1937.85 ; 5765.77,4401.63 cw(c5765.77,4165.41) 6001.99,4165.41

## Other copper
Top Layer:
  text "Premchand" at 4902,4092.57 h118.11
  text "2019-23" at 5332,3997.26 h78.74
  text "EV-Charger" at 3195.97,3188.54 h118.11 r87
  text "Prepaid Smart" at 3006.05,2967.66 h118.11 r91

## Text inside footprints (layer, text, board x,y; h text height)
S1: Document "Footprint dimensions taken from a different datasheet.  / Check the physical device before using the layout." at 5511.02,1873.28 h12
S2: Document "Footprint dimensions taken from a different datasheet.  / Check the physical device before using the layout." at 2867,2575.63 h12